# EAGLE board OR Gate (EAGLE 9.7.0)

Size 122.41 x 56.51 mm. Coordinates in mm from the lower left corner, seen from the top.
Outline: 0,0 122.41,0 122.41,56.51 0,56.51 0,0
Copper layers (1*16): Top 0.035mm / dielectric 1.5mm / Bottom 0.035mm
Design rules "default": minimum track width 6mil, minimum drill 0.35mm, track to track 6mil, track to pad 6mil, pad to pad 6mil, via to via 6mil, smd to smd 6mil, copper to edge 40mil, drill to drill 6mil, minimum pad ring 10mil, minimum via ring 8mil, stop-mask expansion 4mil, vias tented up to drill 0mil, thermal gap 10mil

## Footprints (pad centres in the part's own frame; a part is rotated, then mirrored left to right if it is on the bottom)
LEDRD254W60D565H860B = drill 0.981 pad 1.581: 1 -1.27,0; 2 1.27,0
BATTERY-GENERIC = drill 1.118 pad 3.15 octagon: + 2.54,0; - -2.54,0
RESAD1016W63L850D250B = drill 0.83 pad 1.43: 1 -5.08,0; 2 5.08,0
DIP762W53P254L1969H508Q14B = drill 0.743 pad 1.343: 1 -3.81,7.62; 2 -3.81,5.08; 3 -3.81,2.54; 4 -3.81,0; 5 -3.81,-2.54; 6 -3.81,-5.08; 7 -3.81,-7.62; 8 3.81,-7.62; 9 3.81,-5.08; 10 3.81,-2.54; 11 3.81,0; 12 3.81,2.54; 13 3.81,5.08; 14 3.81,7.62

## Placement (x,y rotation side)
D1  RED  [LEDRD254W60D565H860B]  107.09,8.87 180 top
P1  BATTERYGENERIC  [BATTERY-GENERIC]  8.26,14.14 180 top
R1  1k  [RESAD1016W63L850D250B]  113.44,6.33 0 top
R2  1k  [RESAD1016W63L850D250B]  19.95,45.02 90 top
R3  1k  [RESAD1016W63L850D250B]  25.03,39.94 0 top
R4  1k  [RESAD1016W63L850D250B]  30.11,45.02 90 top
R5  1k  [RESAD1016W63L850D250B]  25.03,50.1 0 top
R6  1k  [RESAD1016W63L850D250B]  33.07,46.82 90 top
R7  1k  [RESAD1016W63L850D250B]  37.57,50.16 0 top
R8  1k  [RESAD1016W63L850D250B]  36.7,40.04 300 top
R9  1k  [RESAD1016W63L850D250B]  41.49,47.54 90 top
R10  1k  [RESAD1016W63L850D250B]  37.35,44.01 180 top
R11  1k  [RESAD1016W63L850D250B]  32.92,40.72 90 top
U1  74HC32_PDIP  [DIP762W53P254L1969H508Q14B]  82.96,12.68 90 top

## Library data of the parts
D1 = Tinkercad; CATEGORY: Opto-Electronic; SUB-CATEGORY: LED; VALUE: LED_RED
P1 R1-R11 U1 = Tinkercad

## Nets
D1_A: D1.1 R1.1
P1-: D1.2 P1.- U1.1 U1.2 U1.7 U1.14
R2_2: R2.2 R5.1
R3_1: R2.1 R3.1
R4_1: R3.2 R4.1
R4_2: R4.2 R5.2
U1_1Y: R1.2 U1.3

## Tracks (layer width: path | path; a pad name or v marks a point on that pad's centre or on a via)
D1_A  (1 unrouted)
P1-  (5 unrouted)
R2_2  (1 unrouted)
R3_1  (1 unrouted)
R4_1  (1 unrouted)
R4_2  (1 unrouted)
U1_1Y  (1 unrouted)